# Altium PCB PCB1.PcbDoc
Units mm, origin at the board's own origin, x right, y up, seen from the top; angles counter-clockwise.
Board outline 88.5 x 66.5 mm, 2 copper layers (Top Layer, Bottom Layer); 50 components, 21 nets, 164 pads, 0 vias.
Unrouted connection lines stored in the file: 106.
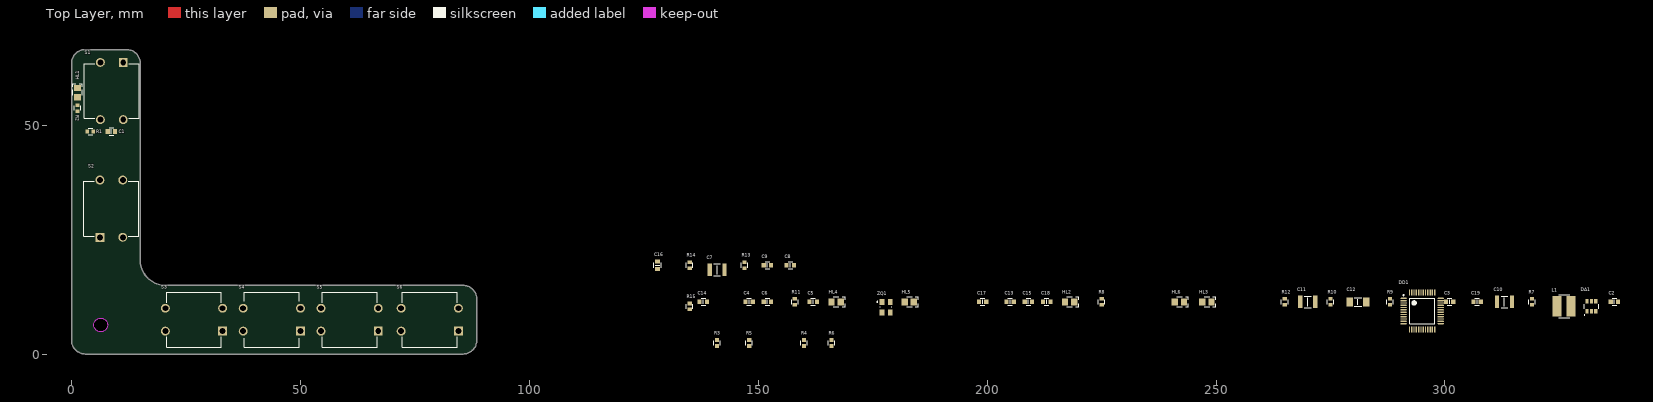
[diagram p0: Top Layer view]
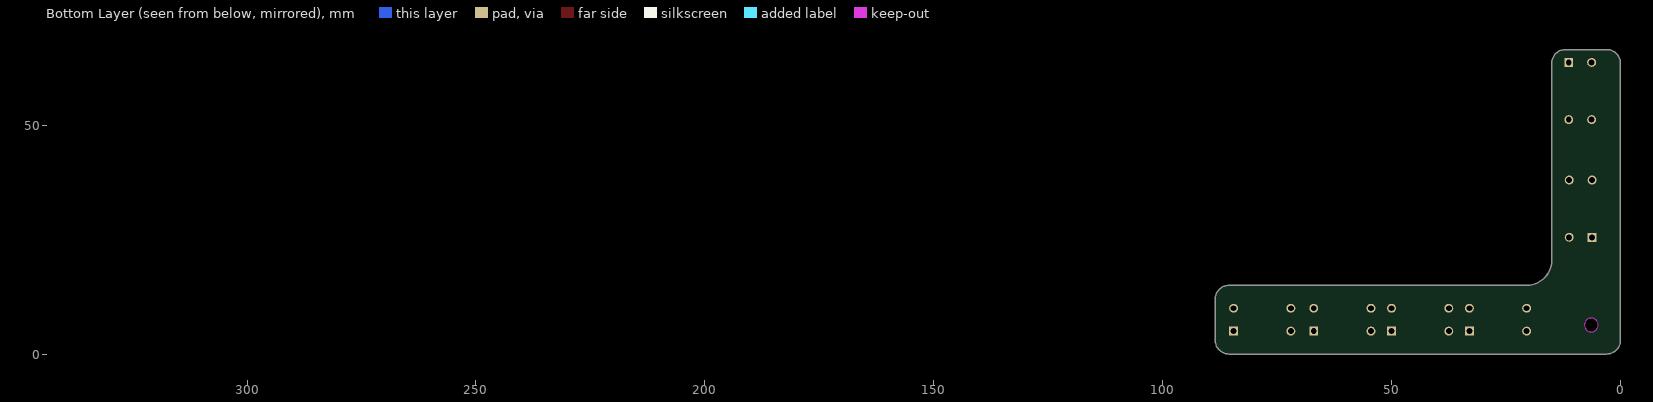
[diagram p1: Bottom Layer view, seen from below]

## Layer stack, top to bottom
Top Solder: solder mask 0.0102, Solder Resist, Dk 3.5
Top Layer: signal copper 0.0356
Dielectric 1: dielectric 0.32, FR-4, Dk 4.8
Bottom Layer: signal copper 0.0356
Bottom Solder: solder mask 0.0102, Solder Resist, Dk 3.5

## Board outline
0.006,3.006 0.006,63.506 cw(c3.006,63.506) 3.006,66.506 12.006,66.506 cw(c12.006,63.506) 15.006,63.506 15.006,20.506 ccw(c20.506,20.506) 20.506,15.006 85.506,15.006 cw(c85.506,12.006) 88.506,12.006 88.506,3.006 cw(c85.506,3.006) 85.506,0.006 3.006,0.006 cw(c3.006,3.006)
cut-out: 6.364,4.864 cw(c6.364,6.364) 6.364,7.864 cw(c6.364,6.364)

## Design rules (kind name [scope] priority, off if disabled: settings)
AcuteAngle [All] p1: minimum=3.50000000000000E+0001 checktracksonly=FALSE
BoardOutlineClearance "BoardOutlineClearance 1" [All] p1: gap=0.25 ignorepadtopadclearanceinfootprint=FALSE except(0: Arc-SplitContinuation Track-SplitContinuation SMDPad-SplitContinuation THPad-SplitContinuation Via-SplitContinuation Fill-SplitContinuation Poly-SplitContinuation Region-SplitContinuation Text-SplitContinuation) // Milling
BoardOutlineClearance "BoardOutlineClearance 2" [All] p2: gap=0.4 ignorepadtopadclearanceinfootprint=FALSE except(0: Arc-SplitContinuation Track-SplitContinuation SMDPad-SplitContinuation THPad-SplitContinuation Via-SplitContinuation Fill-SplitContinuation Poly-SplitContinuation Region-SplitContinuation Text-SplitContinuation) // V-Cut
Clearance "Clearance-1 1/2 Oz" [All] p1: gap=0.125 ignorepadtopadclearanceinfootprint=FALSE except(0.2: Arc-Fill Arc-Poly Track-Fill Track-Poly SMDPad-SMDPad SMDPad-Fill SMDPad-Poly THPad-Fill THPad-Poly Via-Fill Via-Poly Fill-Fill Fill-Poly Poly-Poly Poly-Region Poly-Text; 0.25: Arc-Hole Track-Hole SMDPad-Hole THPad-Hole Via-Hole Fill-Hole Poly-Hole Region-Hole Text-Hole) // Standart
DiffPairsRouting "DiffPairsRouting 1 Oz" [All] p1: maxlimit=0.254 minlimit=0.2 mostfreqgap=0.254 toplayer_minwidth=0.2 toplayer_maxwidth=0.381 toplayer_prefwidth=0.381 bottomlayer_minwidth=0.2 bottomlayer_maxwidth=0.381 bottomlayer_prefwidth=0.381 maxuncoupledlength=12.7
DiffPairsRouting "DiffPairsRouting 1/2 Oz" [All] p2: maxlimit=0.254 minlimit=0.1 mostfreqgap=0.254 toplayer_minwidth=0.1 toplayer_maxwidth=0.381 toplayer_prefwidth=0.381 bottomlayer_minwidth=0.1 bottomlayer_maxwidth=0.381 bottomlayer_prefwidth=0.381 maxuncoupledlength=12.7
HoleSize "Minimum HoleSize VIA 1" [IsVia] p1: absolutevalues=TRUE maxlimit=5.9 minlimit=0.3 maxpercent=80.000 minpercent=20.000 // Standart
HoleToHoleClearance Hole2HoleClearance [All] p1: gap=0.25 allowstackedmicrovias=FALSE
MinimumAnnularRing "Minimum AR VIA Standart" [IsVia] p1: minimumring=0.15
MinimumAnnularRing "Minimum AR PAD Standart" [IsPAD] p2: minimumring=0.2
MinimumSolderMaskSliver "SolderMask Bridge Standart" [All] p1: minsoldermaskwidth=0.15 // All Masks
PlaneClearance "PlaneClearance-1 1/2 Oz" [All] p1: clearance=0.2 // Standart
PlaneConnect "TermalConnect-1 1/2 Oz" [All] p1: planeconnectstyle=Relief reliefexpansion=0.2 reliefentries=4 reliefconductorwidth=0.2 reliefairgap=0.2 // Standart
PolygonConnect [All] p1: connectstyle=Relief reliefconductorwidth=0.254 reliefentries=4 polygonreliefangle="90 Angle" airgapwidth=0.254
PolygonConnect "PolygonConnect-1 1/2 Oz" [All] p2: thpad.connectstyle=Relief thpad.reliefconductorwidth=0.15 thpad.reliefentries=4 thpad.polygonreliefangle="90 Angle" thpad.airgapwidth=0.2 smdpad.connectstyle=Relief smdpad.reliefconductorwidth=0.2 smdpad.reliefentries=4 smdpad.polygonreliefangle="90 Angle" smdpad.airgapwidth=0.2 via.connectstyle=Direct via.reliefconductorwidth=0.254 via.reliefentries=4 via.polygonreliefangle="90 Angle" via.airgapwidth=0.254 // Standart
RoutingCorners [All] p1 off: cornerstyle=45-Degree minsetback=2.54 maxsetback=2.54
RoutingVias [All] p1: holewidth=0.3 width=0.6 viastyle="Through Hole" minholewidth=0.2 minwidth=0.4 maxholewidth=5.9 maxwidth=6.4
SilkToSilkClearance Silk2SilkClearance [All] p1 off: silktosilkclearance=0.15
SilkToSolderMaskClearance Silk2SolderMaskClearance [IsPad] p1 off: minsilkscreentomaskgap=0.15 clearancetoexposedcopper=TRUE
SolderMaskExpansion SolderMaskExpansion-1 [All] p1: expansion=0.05 istentingtop=FALSE // Standart
SolderMaskExpansion "SolderMaskExpansion LDI" [All] p2: expansion=0.025 istentingtop=FALSE // Advance
UnRoutedNet [All] p1: checkbadconnections=TRUE
Width "Width 1/2 Oz" [All] p1: maxlimit=10 minlimit=0.1 preferedwidth=0.125 checkconnectedcopper=TRUE
20 further rules are at their usual default settings.

## Classes and differential pairs
net class BUTTON1[1..6]: BUTTON11 BUTTON12 BUTTON13 BUTTON14 BUTTON15 BUTTON16
component class power: C7 C8 C9 C10 C11 DA1 L1 R13 R14
component class MCU: C12 C13 C14 C15 C16 C17 C18 C19 DD1 R15 ZQ1
component class buttons_and_leds: C1 C2 C3 C5 C6 C8 HL1 HL2 HL3 HL5 HL6 R1 R2 R3 R4 R5 R6 R7 R8 R9 R10 R11 S1 S2 S3 S4 S5 S6

## Components (designator, comment, footprint, x,y, rotation, side; value= is the part's Value field where it differs from the comment)
C1 "Capacitor" 0603C 8.7,48.6 r180 top value="0,1 мк"
C2 "Capacitor" 0603C 337,11.4 r0 top value="0,1 мк"
C3 "Capacitor" 0603C 301,11.4 r0 top value="0,1 мк"
C4 "Capacitor" 0603C 148,11.4 r0 top value="0,1 мк"
C5 "Capacitor" 0603C 162,11.4 r0 top value="0,1 мк"
C6 "Capacitor" 0603C 152,11.4 r0 top value="0,1 мк"
C7 "Capacitor" 1210C 141,18.4 r0 top value="10 мк"
C8 "Capacitor" 0603C 157,19.4 r0 top value="0,1 мк"
C9 "Capacitor" 0603C 152,19.4 r0 top value="100 п"
C10 "Capacitor" 1210C 313,11.4 r0 top value="22 мк"
C11 "Capacitor" 1210C 270,11.4 r0 top value="22 мк"
C12 "Capacitor" 1206C 281,11.4 r0 top value="4,7 мк"
C13 "Capacitor" 0603C 205,11.4 r0 top value="1 мк"
C14 "Capacitor" 0603C 138,11.4 r0 top value="0,1 мк"
C15 "Capacitor" 0603C 209,11.4 r0 top value="0,01 мк"
C16 "Capacitor" 0603C 128,19.4 r90 top value="0,1 мк"
C17 "Capacitor" 0603C 199,11.4 r0 top value="0,1 мк"
C18 "Capacitor" 0603C 213,11.4 r0 top value="12 п"
C19 "Capacitor" 0603C 307,11.4 r0 top value="12 п"
DA1 "AP63200" TSOT26 332,10.4 r0 top
DD1 "STM32F103C8T6" LQFP48 295,9.4 r0 top
HL1 "LED" 0805D 1.3,57.1 r90 top
HL2 "LED" 0805D 218,11.4 r0 top
HL3 "LED" 0805D 248,11.4 r0 top
HL4 "LED" 0805D 167,11.4 r0 top
HL5 "LED" 0805D 183,11.4 r0 top
HL6 "LED" 0805D 242,11.4 r0 top
L1 "SP43-150K" SP43 326,10.4 r0 top value="15 мк"
R1 "Resistor" 0603R 4.1,48.6 r180 top value="10 к"
R2 "Resistor" 0603R 1.3,53.7 r90 top value=220
R3 "Resistor" 0603R 141,2.4 r90 top value="10 к"
R4 "Resistor" 0603R 160,2.4 r90 top value=220
R5 "Resistor" 0603R 148,2.4 r90 top value="10 к"
R6 "Resistor" 0603R 166,2.4 r90 top value=220
R7 "Resistor" 0603R 319,11.4 r90 top value="10 к"
R8 "Resistor" 0603R 225,11.4 r90 top value=220
R9 "Resistor" 0603R 288,11.4 r90 top value="10 к"
R10 "Resistor" 0603R 275,11.4 r90 top value=220
R11 "Resistor" 0603R 158,11.4 r90 top value="10 к"
R12 "Resistor" 0603R 265,11.4 r90 top value=220
R13 "Resistor" 0603R 147,19.4 r90 top value="18 к"
R14 "Resistor" 0603R 135,19.4 r90 top value="56 к"
R15 "Resistor" 0603R 135,10.4 r90 top value="10 к"
S1 "Button_DIP_12x12" Button_DIP_12x12 11.3,63.7 r270 top
S2 "Button_DIP_12x12" Button_DIP_12x12 6.2,25.5 r90 top
S3 "Button_DIP_12x12" Button_DIP_12x12 33,5 r180 top
S4 "Button_DIP_12x12" Button_DIP_12x12 50,5 r180 top
S5 "Button_DIP_12x12" Button_DIP_12x12 67,5 r180 top
S6 "Button_DIP_12x12" Button_DIP_12x12 84.5,5 r180 top
ZQ1 "XTAL_GND" QSMD3.2x2.5 177,11.4 r0 top value="8 МГц"

## Footprints (in the part's own frame and the unit in brackets; to place one, negate y for a bottom-side part, rotate by r counter-clockwise, add the part's x,y. Pads: shape width x height; smd on the part's side, far side on the other; paste and mask are expansions set on the pad)
0603C [mm] "Chip Resistor, 2-Leads, Body 1,40x0,80mm, IPC Medium Density"
  rect 0.9x1.05 smd: 1(-0.8,0) 2(0.8,0)
  silkscreen extent -0.5,-0.77 0.5,0.77, body extent -0.85,-0.45 0.85,0.45, height 0.9
0603R [mm] "Chip Resistor, 2-Leads, Body 1.60x0.85mm, IPC Medium Density"
  rect 0.8x0.95 smd: 1(-0.65,0) 2(0.65,0)
  silkscreen extent -0.5,-0.72 0.5,0.72, body extent -0.87,-0.47 0.88,0.48, height 0.9
0805D [mm]
  rect 1.4x1.5 smd: 1(-1,0) 2(1,0)
  silkscreen extent -0.6,-1.07 1.97,1.07, body extent -1.07,-0.7 1.07,0.7, height 0.7
1206C [mm]
  rect 1.4x2 smd paste+0: 1(-1.8,0) 2(1.8,0)
  silkscreen extent -0.77,-0.92 0.77,0.92, body extent -1.6,-0.74 1.6,0.86, height 1.59
1210C [mm]
  rect 0.954x2.706 smd paste+0: 1(-1.625,0) 2(1.625,0)
  silkscreen extent -0.75,-1.28 0.75,1.28, body extent -2.35,-1.6 2.35,1.6, height 0.25
Button_DIP_12x12 [mm]
  rect 1.95x1.95 hole 1.3: 1(0,0)
  round 1.95 hole 1.3: 1(12.5,0) 2(0,-5) 2(12.5,-5)
  silkscreen extent 0.25,-8.5 12.25,3.5, body extent 0.25,-8.5 12.25,3.5, height 5.9
LQFP48 [mm] "TSQFP, 48-Leads, Body 7,00x7,00mm, Pitch 0,50mm, IPC Medium Density"
  oval 1.4x0.29 smd: 1(-4.05,2.75) 2(-4.05,2.25) 3(-4.05,1.75) 4(-4.05,1.25) 5(-4.05,0.75) 6(-4.05,0.25) 7(-4.05,-0.25) 8(-4.05,-0.75) 9(-4.05,-1.25) 10(-4.05,-1.75) 11(-4.05,-2.25) 12(-4.05,-2.75)
  oval 0.29x1.4 smd paste+0 mask+0.09: 13(-2.75,-4.05) 14(-2.25,-4.05) 15(-1.75,-4.05) 16(-1.25,-4.05) 17(-0.75,-4.05) 18(-0.25,-4.05) 19(0.25,-4.05) 20(0.75,-4.05) 21(1.25,-4.05) 22(1.75,-4.05) 23(2.25,-4.05) 24(2.75,-4.05) 37(2.75,4.05) 38(2.25,4.05) 39(1.75,4.05) 40(1.25,4.05) 41(0.75,4.05) 42(0.25,4.05) 43(-0.25,4.05) 44(-0.75,4.05) 45(-1.25,4.05) 46(-1.75,4.05) 47(-2.25,4.05) 48(-2.75,4.05)
  oval 1.4x0.29 smd paste+0 mask+0.09: 25(4.05,-2.75) 26(4.05,-2.25) 27(4.05,-1.75) 28(4.05,-1.25) 29(4.05,-0.75) 30(4.05,-0.25) 31(4.05,0.25) 32(4.05,0.75) 33(4.05,1.25) 34(4.05,1.75) 35(4.05,2.25) 36(4.05,2.75)
  silkscreen extent -4.17,-2.75 2.75,3.57, body extent -4.5,-4.47 4.5,4.52, height 1.48
QSMD3.2x2.5 [mm] "Кварцевый резонатор"
  rect 1.05x1.3 smd: 1(0,0) 2(1.85,-2.3) 3(0,-2.3) 3(1.85,0)
  silkscreen extent -1.1,-1.18 2.18,0.1, body extent -0.32,-2.75 2.18,0.45, height 0.8
SP43 [mm]
  rect 2x4.5 smd: 1(-1.5,0) 2(1.5,0)
  silkscreen extent -1.2,-2.5 1.3,2.5, body extent -2,-2.22 2,2.22, height 3.19
TSOT26 [mm]
  rect 0.7x1 smd: 1(-0.95,-1.1) 2(0,-1.1) 3(0.95,-1.1) 4(0.95,1.1) 5(0,1.1) 6(-0.95,1.1)
  silkscreen extent -1.58,-1.95 1.57,0.5, body extent -1.5,-1.4 1.5,1.4, height 1.01

## Part data
C1 C2 C3 C4 C5 C6: library part Capacitor_0,1u_10_50V_X7R_0603C, "Конденсатор 0603C ёмкостью 0,1 мк 10%, 50 В, X7R", Capacity (nF)=100, Dielectric=X7R, Tolerance=10%, Voltage (V)=50, Library Path2=Schematic\Capacitor.SchLib, Part Number=Capacitor_0,1u_10_50V_X7R_0603C
C7: library part Capacitor_10u_10_35V_X7R_1210C, "Конденсатор", Capacity (nF)=10000, Dielectric=X7R, Tolerance=0,1, Voltage (V)=35, Library Path2=Schematic\Capacitor.SchLib, Part Number=Capacitor_10u_10_35V_X7R_1210C
C8 C14 C16 C17: library part Capacitor_0,1u_10_50V_X7R_0603C, "Конденсатор", Capacity (nF)=100, Dielectric=X7R, Tolerance=0,1, Voltage (V)=50, Part Number=Capacitor_0,1u_10_50V_X7R_0603C
  C8: Library Path2=Schematic\Capacitor.SchLib
C9: library part Capacitor_100p_10_50V_X7R_0603C, "Конденсатор", Capacity (nF)=0,1, Dielectric=X7R, Voltage (V)=50, Library Path2=Schematic\Capacitor.SchLib, Part Number=Capacitor_100p_10_50V_X7R_0603C, Tolerance=0,1
C10 C11: library part Capacitor_22u_10_25V_X7R_1210C, "Конденсатор", Capacity (nF)=22000, Dielectric=X7R, Tolerance=0,1, Voltage (V)=25, Library Path2=Schematic\Capacitor.SchLib, Part Number=Capacitor_22u_10_25V_X7R_1210C
C12: library part Capacitor_4,7u_10_50V_X7R_1206C, "Конденсатор", Capacity (nF)=4700, Dielectric=X7R, Tolerance=0,1, Voltage (V)=50, Part Number=Capacitor_4,7u_10_50V_X7R_1206C
C13: library part Capacitor_1u_10_50V_X7R_0603C, "Конденсатор", Capacity (nF)=1000, Dielectric=X7R, Tolerance=0,1, Voltage (V)=50, Part Number=Capacitor_1u_10_50V_X7R_0603C
C15: library part Capacitor_10n_10_50V_X7R_0603C, "Конденсатор", Capacity (nF)=10, Dielectric=X7R, Tolerance=0,1, Voltage (V)=50, Part Number=Capacitor_10n_10_50V_X7R_0603C
C18 C19: library part "0,1 мк", "Конденсатор", Part Number=Capacitor
DA1: "DC-DC понижающий преобразователь, Vin: 3.8 - 40 В, adj, 2 А", Part Number=AP63200
DD1: "Микроконтроллер", Case=корпус, Manufacturer="ST Microelectronics", Value1=MCU, Datasheet=http://www.st.com/content/ccc/resource/technical/document/datasheet/33/d4/6f/1d/df/0b/4c/6d/CD00161566.pdf/files/CD00161566.pdf/jcr:content/translations/en.CD00161566.pdf, Notice="48 пиновая версия STM32F103", Part Number=STM32F103C8T6, Rate=-0,3...4,0В, Shop="магазин с самой дешевой ценой"
HL1 HL2 HL3 HL4 HL5 HL6: "Светодиод", Color={Цвет}, Part Number=LED
L1: "Индуктивность на 15 мкГн, номинальный ток 1,3 А", Current (A)=1,3, Inductance (μH)=15, Part Number=SP43-150K
R1 R3 R5 R7 R9 R11: library part Resistor_10k_1_0603, "Резистор номиналом 10 кОм 1%", Tolerance=1%, Part Number=Resistor_10k_1_0603
R2 R4 R6 R8 R10 R12: library part Resistor_220_1_0603, "Резистор номиналом 220 Ом 1%", Tolerance=1%, Part Number=Resistor_220_1_0603
R13: library part Resistor_18k_1_0603, "Резистор номиналом 18 кОм 1%", Tolerance=1%, Part Number=Resistor_18k_1_0603
R14: library part Resistor_56k_1_0603, "Резистор номиналом 56 кОм 1%", Tolerance=1%, Part Number=Resistor_56k_1_0603
R15: library part Resistor_10k_1_0603, "Резистор номиналом 10 кОм и точностью 1%", Tolerance=1%, Part Number=Resistor_10k_1_0603
S1 S2 S3 S4 S5 S6: "Тактовая кнопка, DIP 12 x 12 мм", Part Number=Button_DIP_12x12
ZQ1: "WTL3M85421FO, Резонатор кварцевый 8МГц, 10PPM при 25°C, 20PPM при -40°С+85°C, 400Ом, 12пФ", Part Number=XTAL_GND

## Nets (pads, with @x,y where several pads share a name; then routed paths per layer and width w, separated by ;. In a path a pad name is that pad's centre, name@x,y a point inside that pad or via, vN(x,y) a via of type N, cw(c..) or ccw(c..) an arc to the next point about the centre after c; other vN are vias at no path point)
"+3,3 В": C9.2 C10.2 C11.2 C12.1 C13.2 C14.2 C15.2 C16.2 C17.2 DD1.9 DD1.24 DD1.36 DD1.48 L1.2 R1.2 R2.1 R3.2 R4.1 R5.2 R6.1 R7.2 R8.1 R9.2 R10.1 R11.2 R12.1 R13.2
BST: C8.1 DA1.6
BUTTON1: C1.2 HL1.2 R1.1 S1.2
BUTTON2: C2.2 HL2.2 R3.1 S2.2
BUTTON3: C3.2 HL3.2 R5.1 S3.2
BUTTON4: C4.2 HL4.2 R7.1 S4.2
BUTTON5: C5.2 HL5.2 R9.1 S5.2
BUTTON6: C6.2 HL6.2 R11.1 S6.2
FB: C9.1 DA1.1 R13.1 R14.2
GND: C1.1 C2.1 C3.1 C4.1 C5.1 C6.1 C7.1 C10.1 C11.1 C12.2 C13.1 C14.1 C15.1 C16.1 C17.1 C18.2 C19.2 DA1.4 DD1.8 DD1.23 DD1.35 DD1.47 R14.1 R15.2 S1.1 S2.1 S3.1 S4.1 S5.1 S6.1 ZQ1.3
NetC18_1: C18.1 DD1.6 ZQ1.1
NetC19_1: C19.1 DD1.5 ZQ1.2
NetDD1_44: DD1.44 R15.1
NetHL1_1: HL1.1 R2.2
NetHL2_1: HL2.1 R4.2
NetHL3_1: HL3.1 R6.2
NetHL4_1: HL4.1 R8.2
NetHL5_1: HL5.1 R10.2
NetHL6_1: HL6.1 R12.2
SW: C8.2 DA1.5 L1.1
VIN: C7.2 DA1.2 DA1.3
pads on no net: DD1.1 DD1.2 DD1.3 DD1.4 DD1.7 DD1.10 DD1.11 DD1.12 DD1.13 DD1.14 DD1.15 DD1.16 DD1.17 DD1.18 DD1.19 DD1.20 DD1.21 DD1.22 DD1.25 DD1.26 DD1.27 DD1.28 DD1.29 DD1.30 DD1.31 DD1.32 DD1.33 DD1.34 DD1.37 DD1.38 DD1.39 DD1.40 DD1.41 DD1.42 DD1.43 DD1.45 DD1.46

## Silkscreen, mask and mechanical layers (free items; w line width, h text height)
Mechanical 3:
  lines w0.013: 0.006,3.006 ccw(c3.006,3.006) 3.006,0.006 85.506,0.006 ccw(c85.506,3.006) 88.506,3.006 88.506,12.006 ccw(c85.506,12.006) 85.506,15.006 20.506,15.006 cw(c20.506,20.506) 15.006,20.506 15.006,63.506 ccw(c12.006,63.506) 12.006,66.506 3.006,66.506 ccw(c3.006,63.506) 0.006,63.506 0.006,3.006 ; 6.364,4.864 ccw(c6.364,6.364) 6.364,7.864 ccw(c6.364,6.364) 6.364,4.864